# EAGLE board ehomeShades_v1 (EAGLE 8.7.0)
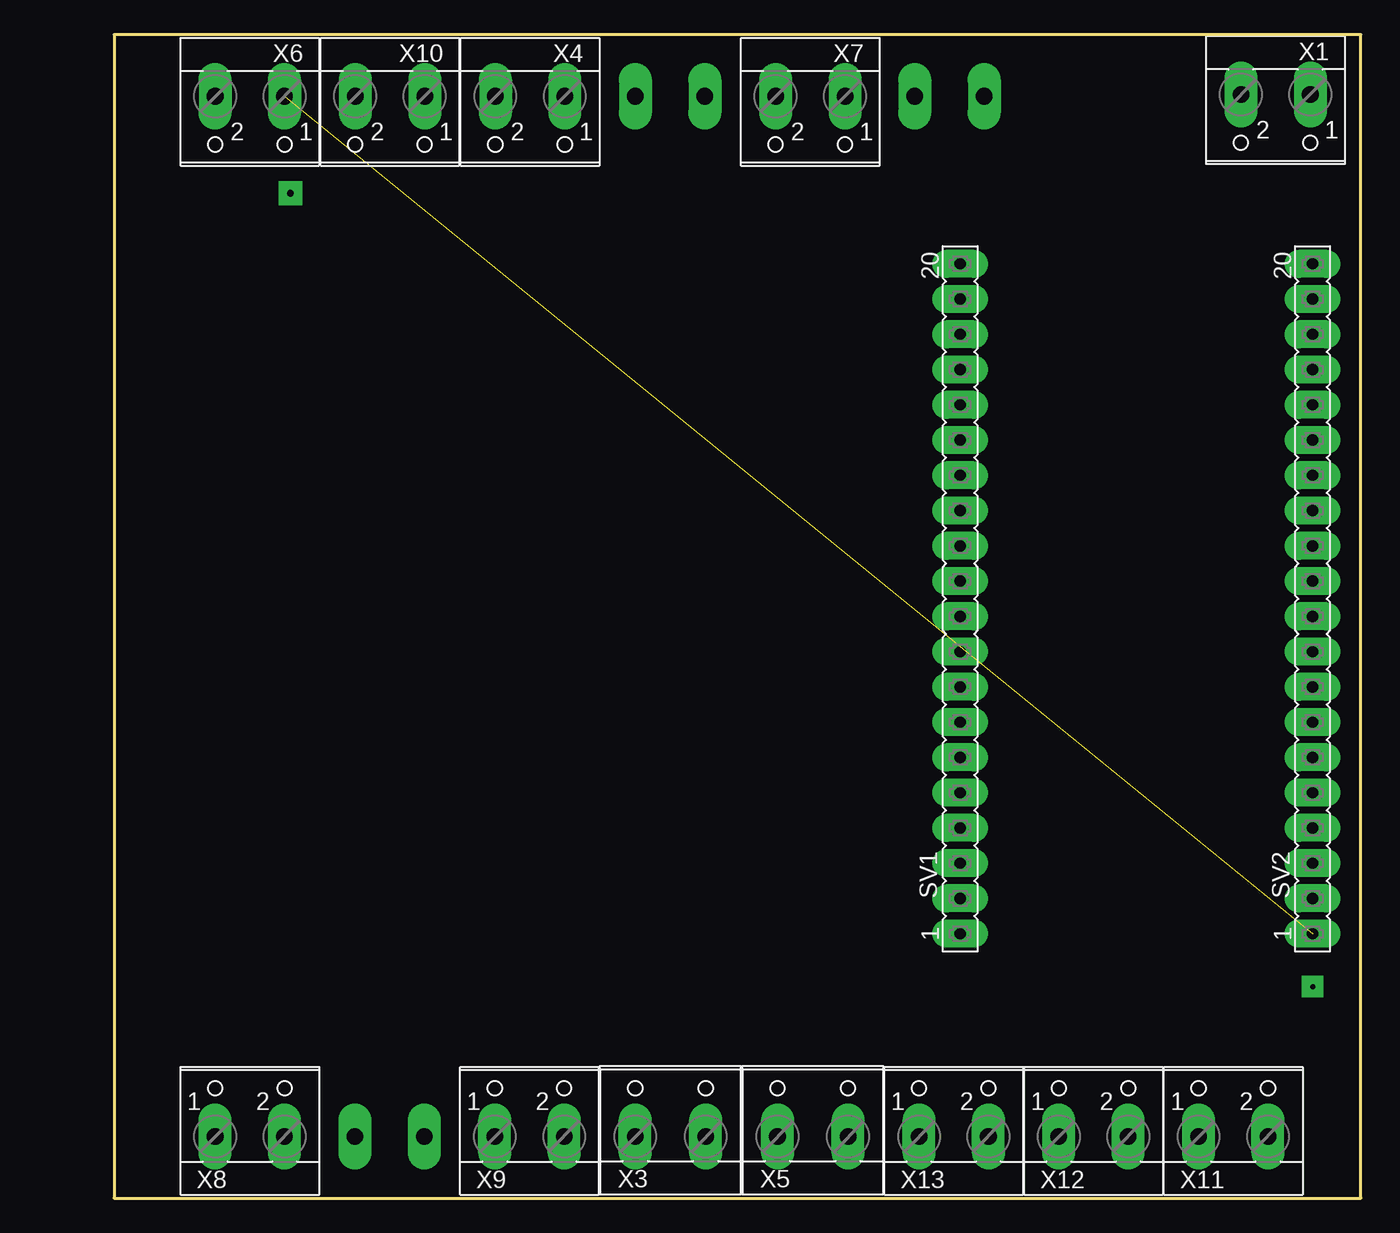
[diagram p0: board, top side]
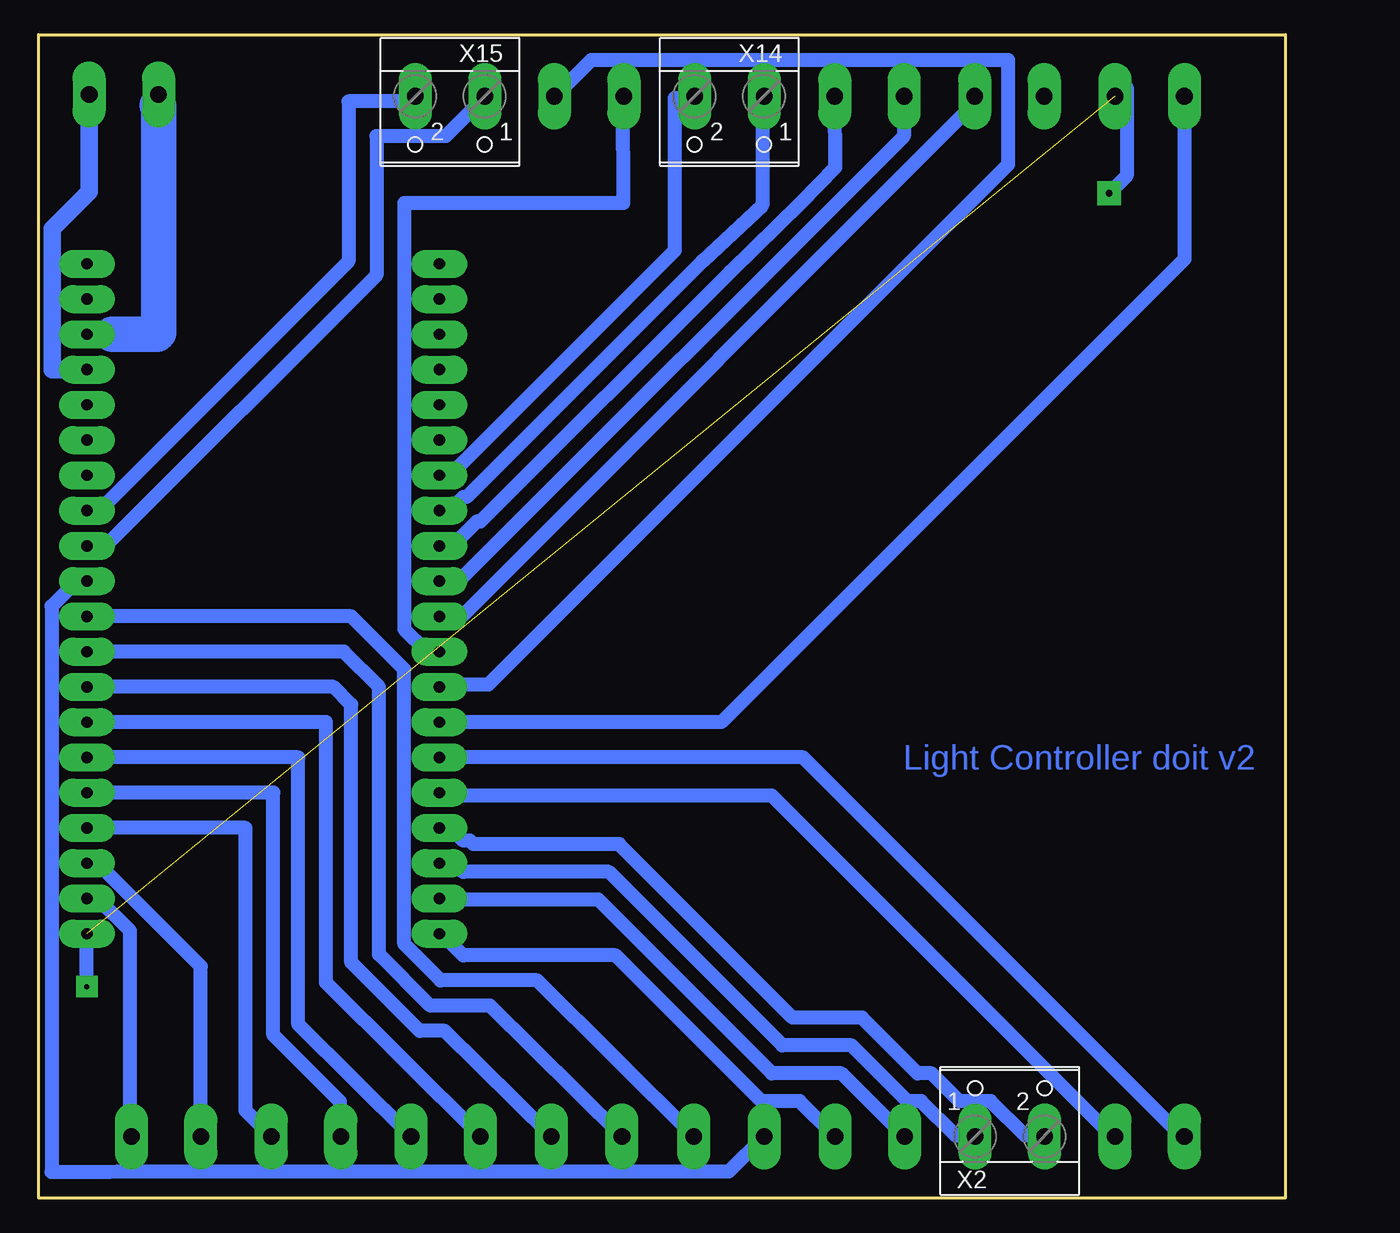
[diagram p1: board, bottom side, seen from below]

Size 89.84 x 83.81 mm. Coordinates in mm from the lower left corner, seen from the top.
Outline: 0,0 89.84,0 89.84,83.81 0,83.81 0,0
Copper layers (1*16): Top 0.035mm / dielectric 1.5mm / Bottom 0.035mm
Design rules "hobby *": minimum track width 1mm, minimum drill 1mm, track to track 0.8mm, track to pad 0.8mm, pad to pad 0.45mm, via to via 0.8mm, smd to smd 8mil, copper to edge 10mil, drill to drill 8mil, minimum pad ring 0.6mm, minimum via ring 0.6mm, stop-mask expansion 0mil, vias tented up to drill 0mil, thermal gap 10mil

## Footprints (pad centres in the part's own frame; a part is rotated, then mirrored left to right if it is on the bottom)
FE20 = drill 0.813 long: 1 -24.13,0; 2 -21.59,0; 3 -19.05,0; 4 -16.51,0; 5 -13.97,0; 6 -11.43,0; 7 -8.89,0; 8 -6.35,0; 9 -3.81,0; 10 -1.27,0; 11 1.27,0; 12 3.81,0; 13 6.35,0; 14 8.89,0; 15 11.43,0; 16 13.97,0; 17 16.51,0; 18 19.05,0; 19 21.59,0; 20 24.13,0
W237-102 = drill 1.194 long: 1 -2.5,-1.27; 2 2.5,-1.27
W237-132 = drill 1.194 long: 1 -2.54,-0.635; 2 2.54,-0.635

## Placement (x,y rotation side)
SV1  [FE20]  60.96,43.18 90 top
SV2  [FE20]  86.36,43.18 90 top
X1  [W237-102]  83.69,78.23 180 top
X2  [W237-102]  19.86,5.71 0 bottom
X3  [W237-132]  40.09,5.08 0 top
X4  [W237-102]  29.97,78.11 180 top
X5  [W237-132]  50.34,5.08 0 top
X6  [W237-102]  9.78,78.11 180 top
X7  [W237-102]  50.16,78.11 180 top
X8  [W237-102]  9.78,5.71 0 top
X9  [W237-102]  29.92,5.71 0 top
X10  [W237-102]  19.88,78.11 180 top
X11  [W237-102]  80.65,5.71 0 top
X12  [W237-102]  70.57,5.71 0 top
X13  [W237-102]  60.5,5.71 0 top
X14  [W237-102]  40.06,78.11 180 bottom
X15  [W237-102]  60.2,78.11 180 bottom

## Library data of the parts
SV1 SV2 = con-lsta; OC_FARNELL: unknown; OC_NEWARK: unknown
X1 X2 X4 X6-X15 = con-wago-500; MPN: 237-102; OC_FARNELL: unknown; OC_NEWARK: 70K9898
X3 X5 = con-wago-508; OC_FARNELL: unknown; OC_NEWARK: unknown

## Nets
EN: SV2.1 X6.1
GND: SV2.17 X1.1
GND1: SV1.3 X2.1
GPIO0: SV1.14 X14.2
GPIO2: SV1.12 X4.1
GPIO4: SV1.11 X4.2
GPIO5: SV1.8 X7.1
GPIO12: SV2.12 X15.1
GPIO13: SV2.13 X15.2
GPIO14: SV2.11 X3.1
GPIO15: SV1.13 X14.1
GPIO16: SV1.10 X10.1
GPIO17: SV1.9 X7.2
GPIO18: SV1.7 X6.2
GPIO19: SV1.6 X8.1
GPIO21: SV1.5 X8.2
GPIO22: SV1.2 X9.1
GPIO23: SV1.1 X9.2
GPIO25: SV2.8 X5.2
GPIO26: SV2.9 X5.1
GPIO27: SV2.10 X3.2
GPIO32: SV2.6 X13.2
GPIO33: SV2.7 X13.1
GPIO34: SV2.4 X12.2
GPIO35: SV2.5 X12.1
GPIO36: SV2.2 X11.2
GPIO39: SV2.3 X11.1
PWR: SV2.18 X1.2
PWR1: SV1.4 X2.2

## Tracks (layer width: path | path; a pad name or v marks a point on that pad's centre or on a via)
EN  (via drill 0.35)  (1 unrouted)
  Bottom 1.016: v86.36,15.24 SV2.1
GND
  Bottom 1.27: X1.1 86.19,72.51 88.85,69.85 88.85,59.69 SV2.17
GND1
  Bottom 1: SV1.3 60.75,24 59.75,24 59.25,23.5 48.75,23.5 36.25,11 31.25,11 27.25,7 26.25,7 23.75,4.5 22.5,4.5 X2.1
GPIO0
  Bottom 1: SV1.14 60.75,52.25 60,52.25 44,68.25 44,79.25 42.75,79.25 X14.2
GPIO2
  Bottom 1: SV1.12 60.75,47 60,47 58.25,48.75 58,48.75 40,66.75 34.92,71.69 32.44,74.23 32.5,79.25 X4.1
GPIO4
  Bottom 1: SV1.11 60.75,44.5 59.5,44.5 27.5,76.5 27.5,79.25 X4.2
GPIO5
  Bottom 1: 19.99,74.45 19.99,82 50,82 52.5,79.5 X7.1 | 60.75,37 SV1.8
  Bottom 1.016: 60.75,37 57.44,37 19.99,74.45
GPIO12
  Bottom 1: SV2.12 86,47 85,47 65.5,66.5 65.5,76.5 60.5,76.5 58,79 X15.1
GPIO13
  Bottom 1: SV2.13 86,49.5 85.5,49.5 67.5,67.5 67.5,79 63,79 X15.2
GPIO14
  Bottom 1.016: SV2.11 86.59,44.22 87.32,44.22 88.9,42.64 88.9,1.91 84.74,1.91 84.14,1.94 40.1,1.94 X3.1
GPIO15
  Bottom 1: SV1.13 60.75,49.75 60,49.75 59.25,50.5 59,50.5 42,67.5 37.68,71.54 37.69,79.29 37.73,79.25 37.75,79.25 X14.1
GPIO16
  Bottom 1: SV1.10 60.75,42 59.25,42 22.5,78.75 22.5,79.25 X10.1
GPIO17
  Bottom 1: SV1.9 61,39.5 62,39.5 63.5,41 63.5,71.67 47.71,71.67 47.75,79.25 X7.2
GPIO18
  Bottom 1: SV1.7 61,34.5 61,34.29
  Bottom 1.016: X6.2 7.28,67.65 40.64,34.29 SV1.7 61,34.29 61.68,34.29
GPIO19
  Bottom 1: SV1.6 34.75,31.75 7.5,4.5 X8.1
GPIO21
  Bottom 1: SV1.5 60.75,29 37,29 12.5,4.5 X8.2
GPIO22
  Bottom 1: SV1.2 60.75,21.5 49.5,21.5 37,9 32,9 27.5,4.5 X9.1
GPIO23
  Bottom 1: SV1.1 60.75,19 59.25,17.5 48.25,17.5 37.75,7 35,7 32.5,4.5 X9.2
GPIO25
  Bottom 1.016: X5.2 60.57,12.06 62.38,12.06 67.31,16.99 67.31,35.56 68.58,36.83 SV2.8
GPIO26
  Bottom 1.016: X5.1 57.31,13.88 61.63,13.88 65.32,17.57 65.32,36.83 67.86,39.37 SV2.9
GPIO27
  Bottom 1.016: X3.2 53.92,15.69 60.88,15.69 63.5,18.32 63.5,38.1 67.31,41.91 SV2.10
GPIO32
  Bottom 1.016: X13.2 71.12,12.52 71.12,31.75 SV2.6
GPIO33
  Bottom 1.016: X13.1 69.13,15.53 69.13,34.29 SV2.7
GPIO34
  Bottom 1.016: X12.2 74.93,6.3 74.93,26.67 SV2.4
GPIO35
  Bottom 1.016: X12.1 68.11,6.95 72.94,11.77 72.94,29.21 SV2.5
GPIO36
  Bottom 1: SV2.2 86.25,21.5 85.5,21.5 83.25,19.25 83.25,4.5 X11.2
GPIO39
  Bottom 1.016: SV2.3 86.13,23.9 85.35,23.9 78.14,16.7 X11.1
N$1  (via drill 0.5)
  Bottom 1.016: 11.43,80.01 11.43,73.66 v12.7,72.39
PWR
  Bottom 1: X1.2 81.25,79.5 81.18,78.64
  Bottom 1.27: 84.55,62.23 SV2.18
  Bottom 2.54: 84.55,62.23 81.28,62.23 81.18,62.33 81.18,78.64 81.28,78.74
PWR1
  Bottom 1: SV1.4 60.75,26.5 60,26.5 59.25,25.75 58.75,25.75 58.5,25.5 48,25.5 35.5,13 30.5,13 26.5,9 25.5,9 23.5,7 21.25,7 18.75,4.5 17.5,4.5 X2.2

## Text on the board
Bottom: Light Controller doit v2